# Altium PCB PCB_ALU.PcbDoc (part 2 of 2)
Units mil, origin at the board's own origin, x right, y up, seen from the top; angles counter-clockwise.
Board outline 7085 x 7085 mil, 4 copper layers (Top Layer, VCC, GND, Bottom Layer), stack 23.756 mil thick; 181 components, 134 nets, 644 pads, 294 vias.
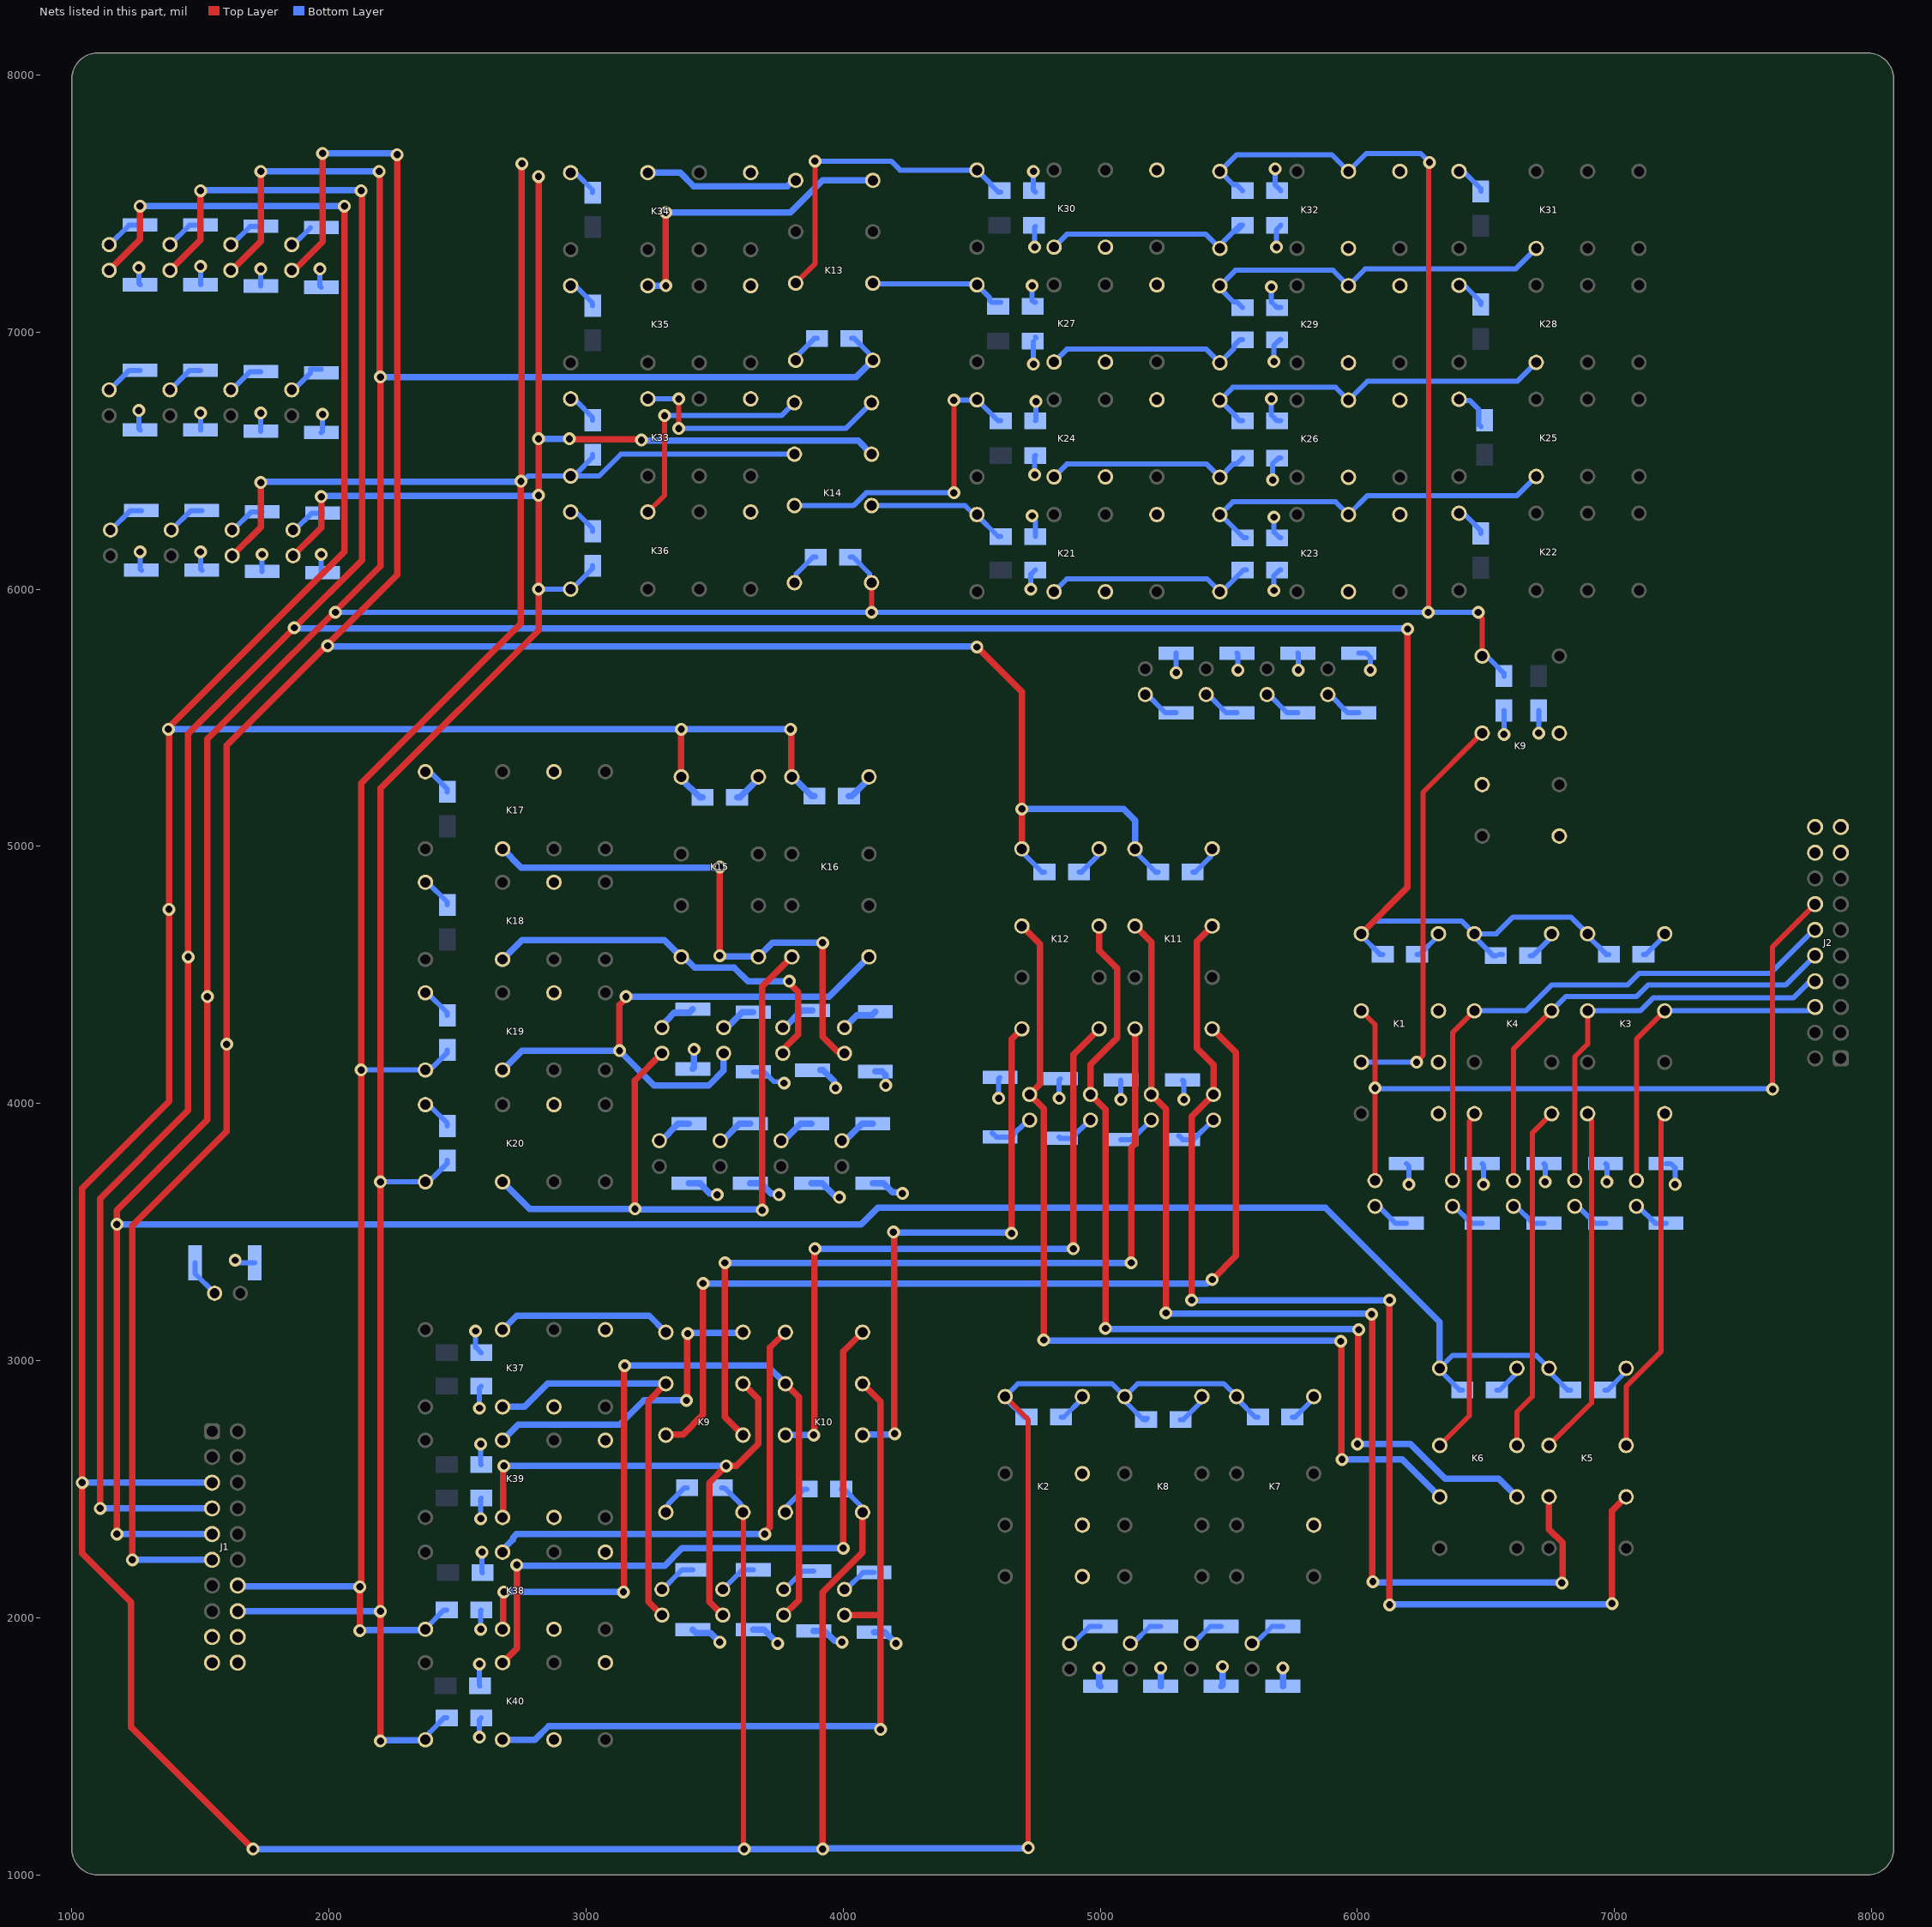
[diagram p4: the nets of this part, all layers, seen from the top]

## Via types
v1: diameter 50, hole 28, Top Layer to Bottom Layer, 290 vias
v2: diameter 240, hole 126, Top Layer to Bottom Layer, 4 vias

## Nets (pads, with @x,y where several pads share a name; then routed paths per layer and width w, separated by ;. In a path a pad name is that pad's centre, name@x,y a point inside that pad or via, vN(x,y) a via of type N, cw(c..) or ccw(c..) an arc to the next point about the centre after c; other vN are vias at no path point) (continued)
ALU_B2: D19.1 D41.1 D48.1 DS37.1 J1.14 K14.6 K19.1 K33.1 K38.1 | length 9760.7
  Top Layer w25: DS37.1@1623.33,6130 1735,6241.67 v1(1735,6415) ; v1(2120,1950) v1(2120,2120) ; v1@2125.23,2120 2125.23,5245.23 2746.3,5866.3 v1(2746.3,6420) 2748.15,6421.85 2748.15,7653.15 v1(2750,7655)
  Bottom Layer w20: v1(2125,4130) K19.1@2375,4130 2382.65,4137.65 2400.15,4137.65 2460,4197.5 D19.1@2460,4208 ; K38.1@2375,1955 2375,1957.5 2447.5,2030 D48.1@2458,2030 ; v1(2746.3,6420) 2754.41,6420 2774.41,6440 K33.1@2940,6440 ; D41.1@3025,6523 3025,6512.5 2960.15,6447.65 2947.65,6447.65 K33.1@2940,6440 ; K14.6@3810,6525 3135,6525 3050,6440 K33.1@2940,6440
  Bottom Layer w25: J1.14@1645,2125 1647.5,2122.5 2117.5,2122.5 v1(2120,2120) ; v1(1735,6415) 1737.5,6417.5 v1@2743.8,6417.5 ; v1(2120,1950) 2122.5,1952.5 2372.5,1952.5 K38.1@2375,1955
ALU_B3: D20.1 D44.1 D52.1 DS38.1 J1.16 K14.3 K20.1 K36.1 K40.1 | length 10197.7
  Top Layer w25: DS38.1@1865,6125 DS38.1@1860,6130 1970,6240 v1(1970,6360) ; v1(2200,1520) v1(2200,2025) 2200,5225 2815,5840 v1(2815,6000) v1(2815,6365) v1(2815,6585) v1(2815,7605) ; v1(2935,6585) 2937.5,6582.5 3212.5,6582.5 v1(3215,6580)
  Bottom Layer w20: v1(2200,3695) K20.1@2375,3695 2382.65,3702.65 2395.15,3702.65 2460,3767.5 D20.1@2460,3778 ; K40.1@2375,1525 2375,1535.82 2391.18,1552 2391.18,1553.68 2447.5,1610 D52.1@2458,1610 ; v1(2815,6000) K36.1@2940,6000 2944.5,6000 3025,6080.5 D44.1@3025,6091
  Bottom Layer w25: J1.16@1645,2025 v1(2200,2025) ; v1(1970,6360) 1972.5,6362.5 v1@2812.5,6362.5 ; v1(2200,1520) 2202.5,1522.5 2372.5,1522.5 K40.1@2375,1525 ; v1(2815,6585) v1(2935,6585) ; v1(3215,6580) 3217.5,6577.5 4057.5,6577.5 K14.3@4110,6525
ALU_Cout: DS26.1 J2.14 K1.2 | length 3019.2
  Top Layer w20: K1.2@6015,4360 6068.33,4306.67 v1(6068.33,4060) DS26.1@6068.33,3700 ; v1(7615,4055) 7615,4610 J2.14@7780,4775
  Bottom Layer w20: v1(6068.33,4060) 6070.83,4057.5 7612.5,4057.5 v1(7615,4055)
ALU_Gates0: DS9.1 K5.6 K11.7 | length 4801.8
  Top Layer w25: v1(5355,3235) 5355,3950 DS9.1@5440,4035 5440,4150 5375,4215 5375,4630 K11.7@5435,4690 ; v1(6125,2050) v1(6125,3235) ; v1(6990,2055) 6990,2415 K5.6@7045,2470
  Bottom Layer w25: v1(5355,3235) v1(6125,3235) ; v1(6125,2050) 6127.5,2052.5 6987.5,2052.5 v1(6990,2055)
ALU_Gates1: DS10.1 K5.3 K11.2 | length 4493.7
  Top Layer w25: K11.2@5135,4690 5198.33,4626.67 DS10.1@5198.33,4035 5255,3978.33 v1(5255,3185) ; v1(6055,3180) 6057.5,3177.5 6057.5,2142.5 v1(6060,2140) ; K5.3@6745,2470 6745,2344.25 6797.5,2291.75 6797.5,2137.5 v1(6795,2135)
  Bottom Layer w25: v1(5255,3185) 5257.5,3182.5 6052.5,3182.5 v1(6055,3180) ; v1(6060,2140) 6062.5,2137.5 6792.5,2137.5 v1(6795,2135)
ALU_Gates2: DS11.1 K6.6 K12.7 | length 3800
  Top Layer w25: K12.7@4995,4690 4995,4595 5065,4525 5065,4255 4961.67,4151.67 DS11.1@4961.67,4035 5020,3976.67 v1(5020,3125) ; v1(6000,2675) 6002.5,2677.5 6002.5,3117.5 v1(6005,3120)
  Bottom Layer w25: v1(5020,3125) 5022.5,3122.5 6002.5,3122.5 v1(6005,3120) ; v1(6000,2675) 6206.15,2675 6341.15,2540 6550,2540 K6.6@6620,2470
ALU_Gates3: DS12.1 K6.3 K12.2 | length 3737.5
  Top Layer w25: K12.2@4695,4690 4765,4620 4765,4075 DS12.1@4725,4035 4780,3980 v1(4780,3080) ; v1(5935,3075) 5937.5,3072.5 5937.5,2617.5 v1(5940,2615)
  Bottom Layer w25: v1(4780,3080) 4782.5,3077.5 5932.5,3077.5 v1(5935,3075) ; v1(5940,2615) 6175,2615 K6.3@6320,2470
ALU_OR0: DS5.1 K15.5 K17.2 | length 2122.8
  Top Layer w25: v1(3520,4575) v1(3520,4920) ; v1(3920,4625) 3920,4260 3978.48,4201.52 3998.48,4201.52 DS5.1@4005,4195
  Bottom Layer w25: K17.2@2675,4990 2747.5,4917.5 3517.5,4917.5 v1(3520,4920) ; v1(3520,4575) 3523.96,4571.04 3668.96,4571.04 K15.5@3670,4570 3725,4625 v1(3920,4625)
ALU_OR1: DS6.1 K15.4 K18.2 | length 1537.4
  Top Layer w25: DS6.1@3751.11,4195 3825,4268.89 3825,4433.24 3790,4468.24 v1(3790,4475)
  Bottom Layer w25: K18.2@2675,4560 2750,4635 3305,4635 K15.4@3370,4570 3379.47,4570 3421.97,4527.5 3576.35,4527.5 3628.85,4475 v1(3790,4475)
ALU_OR2: DS7.1 K16.5 K19.2 | length 2267.5
  Top Layer w25: v1(3130,4205) 3130,4383.24 3155,4408.24 v1(3155,4415)
  Bottom Layer w25: K19.2@2675,4130 2750,4205 v1(3130,4205) 3265,4070 3476.82,4070 3535,4128.18 DS7.1@3535,4195 ; v1(3155,4415) 3945,4415 K16.5@4100,4570
ALU_OR3: DS8.1 K16.4 K20.2 | length 2736.7
  Top Layer w25: v1(3190,3590) 3190,4090 DS8.1@3295,4195 ; v1(3685,3585) 3685,4455 K16.4@3800,4570
  Bottom Layer w25: K20.2@2675,3695 2780,3590 v1(3190,3590) 3192.5,3587.5 3682.5,3587.5 v1(3685,3585)
ALU_OUT0: DS27.1 J2.6 K3.7 | length 1296.8
  Top Layer w20: DS27.1@7085,3700 7085,4250 K3.7@7195,4360
  Bottom Layer w20: K3.7@7195,4360 7753.37,4360 7768.37,4375 J2.6@7780,4375
ALU_OUT1: DS28.1 J2.8 K3.2 | length 1613.3
  Top Layer w20: DS28.1@6845,3700 6845,4180.71 6895,4230.71 K3.2@6895,4360
  Bottom Layer w20: K3.2@6895,4360 7100,4360 7150,4410 7695,4410 7751.77,4466.77 7771.77,4466.77 J2.8@7780,4475
ALU_OUT2: DS29.1 J2.10 K4.7 | length 1835.5
  Top Layer w20: DS29.1@6606.67,3700 6606.67,4211.67 K4.7@6755,4360
  Bottom Layer w20: K4.7@6755,4360 6810,4415 7085,4415 7130,4460 7665,4460 J2.10@7780,4575
ALU_OUT3: DS30.1 J2.12 K4.2 | length 2150.7
  Top Layer w20: DS30.1@6370,3700 6370,4275 K4.2@6455,4360
  Bottom Layer w20: K4.2@6455,4360 6655,4360 6755,4460 7050,4460 7095,4505 7605,4505 7775,4675 J2.12@7780,4675
ALU_XNOR0: K9.5@3310,3110 K37.7 | length 684.7
  Bottom Layer w25: K37.7@2675,3120 2730,3175 3245,3175 K9.5@3310,3110
ALU_XNOR1: K9.4@3610,3110 K39.7 | length 1258.3
  Top Layer w25: v1(3390,2845) 3392.5,2847.5 3392.5,3102.5 v1(3395,3105)
  Bottom Layer w25: K39.7@2675,2690 2735,2750 3130,2750 3225,2845 v1(3390,2845) ; v1(3395,3105) 3397.5,3107.5 3607.5,3107.5 K9.4@3610,3110
ALU_XNOR2: K10.5 K38.7 | length 1876.1
  Top Layer w25: v1(3695,2325) 3695,2331.76 3715,2351.76 3715,3050 K10.5@3775,3110
  Bottom Layer w25: K38.7@2675,2255 2675,2264.47 2715,2304.47 2715,2310.36 2729.64,2325 v1(3695,2325)
ALU_XNOR3: K10.4 K40.7 | length 2572.8
  Top Layer w25: K40.7@2675,1825 2730,1880 v1(2730,2205) ; v1(4000,2270) 4000,3035 K10.4@4075,3110
  Bottom Layer w25: v1(2730,2205) 2732.5,2202.5 3305.68,2202.5 3373.18,2270 v1(4000,2270)
ALU_XOR0: DS13.1 K9.6@3310,2910 K37.2 | length 1621.6
  Top Layer w25: DS13.1@3295,2010 3242.97,2062.03 3242.97,2842.97 K9.6@3310,2910
  Bottom Layer w25: K37.2@2675,2820 2760,2820 2850,2910 K9.6@3310,2910
ALU_XOR1: DS14.1 K9.3@3610,2910 K39.2 | length 2115.8
  Top Layer w25: K39.2@2675,2390 2677.5,2392.5 2677.5,2587.5 v1(2680,2590) ; DS14.1@3531.67,2010 3479.64,2062.03 3479.64,2524.64 v1(3545,2590) 3585,2590 3670,2675 3670,2850 K9.3@3610,2910
  Bottom Layer w25: v1(2680,2590) v1(3545,2590)
ALU_XOR2: DS15.1 K10.6 K38.2 | length 3094.4
  Top Layer w25: K38.2@2675,1955 2677.5,1957.5 2677.5,2097.5 v1(2680,2100) ; v1(3145,2100) 3147.5,2102.5 3147.5,2977.5 v1(3150,2980) ; DS15.1@3768.33,2010 3827.5,2069.17 3827.5,2857.5 K10.6@3775,2910
  Bottom Layer w25: v1(2680,2100) v1(3145,2100) ; v1(3150,2980) 3705,2980 K10.6@3775,2910
ALU_XOR3: DS16.1 K10.3 K40.2 | length 3010.9
  Top Layer w25: DS16.1@4005,2010 4145,2010 ; K10.3@4075,2910 4145,2840 4145,2010 ; v1(4145,1565) 4145,2010
  Bottom Layer w25: K40.2@2675,1525 2800.75,1525 2853.25,1577.5 4125.74,1577.5 4138.24,1565 v1(4145,1565)
ALU_XORXNOR0: K9.7@3310,2710 K11.5 | length 3725.6
  Top Layer w25: K9.7@3310,2710 3312.5,2712.5 3377.5,2712.5 3455,2790 v1(3455,3300) ; v1(5435,3315) 5527.03,3407.03 5527.03,4197.97 K11.5@5435,4290
  Bottom Layer w25: v1(3455,3300) 5413.24,3300 5428.24,3315 v1(5435,3315)
ALU_XORXNOR1: K9.2@3610,2710 K11.4 | length 3195.2
  Top Layer w25: v1(3540,3380) 3540,2780 K9.2@3610,2710 ; v1(5120,3380) 5120,3828.54 5135,3843.54 K11.4@5135,4290
  Bottom Layer w25: v1(3540,3380) v1(5120,3380)
ALU_XORXNOR2: K10.7 K12.5 | length 2738.5
  Top Layer w25: v1(3885,2710) 3887.5,2712.5 3887.5,3432.5 v1(3890,3435) ; v1(4895,3435) 4895,4190 K12.5@4995,4290
  Bottom Layer w25: K10.7@3775,2710 v1(3885,2710) ; v1(3890,3435) v1(4895,3435)
ALU_XORXNOR3: K10.2 K12.4 | length 2187.8
  Top Layer w25: v1(4195,3500) 4197.5,3497.5 4197.5,2717.5 v1(4200,2715) ; v1(4655,3495) 4655,4250 K12.4@4695,4290
  Bottom Layer w25: K10.2@4075,2710 4077.5,2712.5 4197.5,2712.5 v1(4200,2715) ; v1(4195,3500) 4197.5,3497.5 4652.5,3497.5 v1(4655,3495)
AxB_U_FullAdder1: D25.1 K21.2 K23.1 | length 824.6
  Bottom Layer w20: K21.2@4820,5990 4870,6040 5415,6040 K23.1@5465,5990 5472.5,5990 5557.5,6075 D25.1@5568,6075
AxB_U_FullAdder2: D30.1 K24.2 K26.1 | length 806.2
  Bottom Layer w20: K24.2@4820,6436.67 4870,6486.67 5413.33,6486.67 K26.1@5465,6435 5517.5,6487.5 5530.5,6487.5 D30.1@5553,6510
AxB_U_FullAdder3: D35.1 K27.2 K29.1 | length 818.4
  Bottom Layer w20: K27.2@4820,6883.33 4870,6933.33 5411.67,6933.33 K29.1@5465,6880 ; K29.1@5465,6882 5520,6937 5520,6947.5 5542.5,6970 D35.1@5553,6970
AxB_U_FullAdder4: D40.1 K30.2 K32.1 | length 863.7
  Bottom Layer w20: K30.2@4820,7330 4870,7380 5410,7380 K32.1@5465,7325 ; K32.1@5465,7335.82 K32.1@5465,7325 ; D40.1@5530.5,7392.5 D40.1@5553,7415 5542.5,7415 5472.65,7345.15 5472.65,7332.65 K32.1@5465,7325
B_U_FullAdder1: D21.1 K14.2 K21.8 | length 554.2
  Bottom Layer w20: K14.2@4110,6325 4474.18,6325 4509.18,6290 K21.8@4520,6290 4520,6287.5 4602.5,6205 D21.1@4613,6205
B_U_FullAdder2: D26.1 K14.7 K24.8 | length 1218.2
  Top Layer w20: v1(4430,6375) v1(4430,6735)
  Bottom Layer w20: K14.7@3810,6325 4039.29,6325 4089.29,6375 v1(4430,6375) ; v1(4430,6735) 4430.83,6735.83 4519.17,6735.83 K24.8@4520,6736.67 4520.83,6736.67 4602.5,6655 D26.1@4613,6655
B_U_FullAdder3: D31.1 K13.2 K27.8 | length 535.4
  Bottom Layer w20: K13.2@4115,7190 4118.33,7186.67 4516.67,7186.67 4570,7133.33 4570,7122.5 4577.5,7115 D31.1@4613,7115
B_U_FullAdder4: D36.1 K13.7 K30.8 | length 1280.2
  Top Layer w20: K13.7@3815,7190 3890,7265 v1(3890,7665)
  Bottom Layer w20: v1(3890,7665) 4186.15,7665 4221.15,7630 K30.8@4520,7630 4575,7575 4575,7572.5 4602.5,7545 D36.1@4613,7545
Cin_U_FullAdder1: D24.1 K23.6 K23.8 K25.2 | length 1473.1
  Bottom Layer w20: D24.1@5568,6200 5557.5,6200 5467.5,6290 K23.8@5465,6290 5515,6340 5915,6340 K23.6@5965,6290 6039.17,6364.17 6620.83,6364.17 K25.2@6695,6438.33
Cin_U_FullAdder2: D29.1 K26.6 K26.8 K28.2 | length 1454.8
  Bottom Layer w20: D29.1@5553,6655 5542.5,6655 5520,6677.5 5520,6680 K26.8@5465,6735 5515,6785 5915,6785 K26.6@5965,6735 6038.33,6808.33 6621.67,6808.33 K28.2@6695,6881.67
Cin_U_FullAdder3: D34.1 K29.6 K29.8 K31.2 | length 1468.8
  Bottom Layer w20: D34.1@5553,7095 5530.5,7117.5 5517.5,7117.5 5465,7170 K29.8@5465,7180 5525,7240 5905,7240 K29.6@5965,7180 6030,7245 6615,7245 K31.2@6695,7325
Cin_U_FullAdder4: D5.1 D6.1 D13.1@4027,6125 D14.1 D39.1 DS23.1 J1.9 K5.1 K6.1 K9.1@6485,5740 K13.1 K14.1 K32.6 K32.8 | length 23099.8
  Top Layer w20: v1(4110,5910) K14.1@4110,6025 ; v1(6275,5910) 6277.5,5912.5 6277.5,7657.5 v1(6280,7660) ; v1(6470,5910) 6470,5901.88 6485,5886.88 K9.1@6485,5740
  Top Layer w25: v1(1175,2325) v1(1175,3530) 1175,3585 1527.05,3937.05 v1(1527.05,4415) 1527.05,5417.05 2200,6090 v1(2200,6825) 2197.5,6827.5 2197.5,7624.16 v1@2196.66,7625 ; DS23.1@1618.33,7240 1621.61,7240 1735,7353.39 v1(1735,7625)
  Bottom Layer w20: v1(2025,5910) v1(4110,5910) v1(6275,5910) v1(6470,5910) ; D13.1@4027,6125 4037.5,6125 4102.35,6060.15 4102.35,6032.65 K14.1@4110,6025 ; D14.1@4032,6975 4042.5,6975 4107.35,6910.15 4107.35,6897.65 K13.1@4115,6890 ; D39.1@5553,7550 5530.5,7572.5 5517.5,7572.5 K32.8@5465,7625 5530,7690 5900,7690 K32.6@5965,7625 6035,7695 6245,7695 v1(6280,7660) ; D5.1@6408,2885 6397.5,2885 6320,2962.5 K6.1@6320,2970 6370,3020 6695,3020 K5.1@6745,2970 6752.65,2962.35 6752.65,2949.85 6817.5,2885 D6.1@6828,2885 ; K9.1@6485,5740 6492.65,5732.35 6510.15,5732.35 6570,5672.5 D14.1@6570,5662
  Bottom Layer w25: v1(1175,2325) J1.9@1545,2325 ; v1(1175,3530) 4070,3530 4135,3595 5875,3595 6130,3340 6320,3150 K6.1@6320,2970 ; v1(1735,7625) v1(2195,7625) v1@2196.66,7625 ; v1(2200,6825) 4050,6825 K13.1@4115,6890
GND: D1.2 D2.2 D3.2 D4.2 D5.2 D6.2 D7.2 D8.2 D9.2 D10.2 D11.2 D12.2 D13.2 D14.2 D15.2 D16.2 D17.2 D18.2 D19.2 D20.2 D21.2 D22.2 D23.2 D24.2 D25.2 D26.2 D27.2 D28.2 D29.2 D30.2 D31.2 D32.2 D33.2 D34.2 D35.2 D36.2 D37.2 D38.2 D39.2 D40.2 D41.2 D42.2 D43.2 D44.2 D45.2 D46.2 D47.2 D48.2 D49.2 D50.2 D51.2 D52.2 J1.17 J1.18 J1.19 J1.20 J2.17 J2.18 J2.19 J2.20 K1.8 K2.8 K3.8 K4.8 K5.8 K6.8 K7.6 K7.8 K8.8 K9.3@6485,5240 K9.5@6785,5040 K9.8@3310,2410 K10.8 K11.8 K12.8 K13.8 K14.8 K15.8 K16.8 K17.6 K17.8 K18.6 K18.8 K19.6 K19.8 K20.6 K20.8 K21.3 K21.5 K22.8 K23.3 K23.5 K24.3 K24.5 K25.8 K26.3 K26.5 K27.3 K27.5 K28.8 K29.3 K29.5 K30.3 K30.5 K31.8 K32.3 K32.5 K33.5 K33.8 K34.5 K34.8 K35.5 K35.8 K36.5 K36.8 K37.3 K37.5 K38.3 K38.5 K39.3 K39.5 K40.3 K40.5 R1.2 R2.2 R3.2 R4.2 R?1.2 R?2.2 R?3.2 R?4.2 R?5.2 R?6.2 R?7.2 R?8.2 R?9.2 R?10.2 R?11.2 R?12.2 R?13.2 R?14.2 R?15.2 R?16.2 R?17.2 R?18.2 R?19.2 R?20.2 R?21.2 R?22.2 R?23.2 R?24.2 R?25.2 R?26.2 R?27.2 R?28.2 R?29.2 R?30.2 R?31.2 R?32.2 R?33.2 R?34.2 R?35.2 R?36.2 R?37.2 R?38.2 | length 9490.2
  Bottom Layer w20: v1(1260,6695) 1260,6624 R?27.2@1265,6619 ; v1(1260,7250) 1260,7189 R?17.2@1265,7184 ; v1(1265,6145) 1265,6079 R?31.2@1270,6074 ; v1(1500,6145) 1500,6079 R?32.2@1505,6074 ; R?28.2@1500,6619 v1(1500,6685) ; R?18.2@1500,7184 v1(1500,7255) ; v1(1635,3390) 1643.12,3390 1653.12,3380 R?21.2@1711,3380 ; R?29.2@1735,6614 v1(1735,6685) ; R?19.2@1735,7179 v1(1735,7245) ; R?33.2@1740,6069 v1(1740,6135) ; v1(1965,7245) 1965,7179 R?20.2@1970,7174 ; v1(1970,6135) 1970,6069 R?34.2@1975,6064 ; R?30.2@1970,6609 1975,6614 v1(1975,6680) ; K20.8@2375,3995 2382.65,3987.35 2395.15,3987.35 2460,3922.5 D20.2@2460,3912 ; K19.8@2375,4430 2382.5,4430 2460,4352.5 D19.2@2460,4342 ; K18.8@2375,4860 2382.5,4860 2460,4782.5 D18.2@2460,4772 ; K17.8@2375,5290 2382.65,5282.35 2400.15,5282.35 2460,5222.5 D17.2@2460,5212 ; v1(2570,3115) 2570,3052 D45.2@2592,3030 ; v1(2585,1535) 2585,1603 D52.2@2592,1610 ; v1(2585,1820) 2585,1737 D50.2@2587,1735 ; v1(2585,2815) 2585,2893 D47.2@2592,2900 ; v1(2590,1955) 2590,2028 D48.2@2592,2030 ; v1(2590,2385) 2590,2463 D51.2@2592,2465 ; v1(2590,2675) 2590,2597 D49.2@2592,2595 ; v1(2595,2255) 2595,2177 D46.2@2597,2175 ; K36.8@2940,6300 2947.65,6292.35 2968.15,6292.35 3025,6235.5 D44.2@3025,6225 ; K33.8@2940,6740 2947.65,6732.35 2960.15,6732.35 3025,6667.5 D41.2@3025,6657 ; K35.8@2940,7180 2947.65,7172.35 2965.15,7172.35 3025,7112.5 D43.2@3025,7102 ; K34.8@2940,7620 2947.65,7612.35 2965.15,7612.35 3025,7552.5 D42.2@3025,7542 ; K9.8@3310,2410 3317.65,2417.65 3317.65,2440.15 3382.5,2505 D9.2@3393,2505 ; R?3.2@3650,4123 3692,4123 3730.26,4084.74 3764.26,4084.74 v1(3770,4079) ; K10.8@3775,2410 3782.65,2417.65 3782.65,2435.15 3847.5,2500 D10.2@3858,2500 ; K14.8@3810,6025 3817.65,6032.65 3817.65,6060.15 3882.5,6125 D13.2@3893,6125 ; K13.8@3815,6890 3822.65,6897.65 3822.65,6910.15 3887.5,6975 D14.2@3898,6975 ; v1(4605,4020) 4605,4096 R?8.2@4610,4101 ; v1(4730,6000) 4730,6058 D22.2@4747,6075 ; v1(4735,6285) 4735,6276.88 4747,6264.88 D21.2@4747,6205 ; v1(4735,7180) 4735,7122.5 4742.5,7115 D31.2@4747,7115 ; v1(4740,6875) D32.2@4740,6962 ; v1(4740,7625) 4740,7552 D36.2@4747,7545 ; v1(4745,6445) 4745,6518 D27.2@4747,6520 ; v1(4745,7330) 4745,7408 D37.2@4747,7410 ; D26.2@4747,6655 4750,6658 v1(4750,6730) ; D32.2@4747,6980 D32.2@4750,6977 ; v1(4840,4020) 4840,4091 R?7.2@4845,4096 ; D2.2@4847,2780 4857.5,2780 4930,2852.5 K2.8@4930,2860 ; D12.2@4917,4900 4927.5,4900 4987.35,4959.85 4987.35,4982.35 K12.8@4995,4990 ; v1(5080,4015) R?6.2@5080,4091 ; v1(5295,5675) R?38.2@5295,5751 ; D7.2@5312,2770 5322.5,2770 5387.35,2834.85 5387.35,2852.35 K8.8@5395,2860 ; R?5.2@5320,4091 5325,4086 v1(5325,4015) ; D11.2@5359,4900 5369.5,4900 5427.35,4957.85 5427.35,4982.35 K11.8@5435,4990 ; R?37.2@5531.67,5751 5535,5747.67 v1(5535,5685) ; v1(5665,6740) 5665,6677.5 5687.5,6655 D29.2@5702,6655 ; v1(5665,7175) 5665,7117.5 5687.5,7095 D34.2@5702,7095 ; v1(5670,6425) 5670,6487.5 5692.5,6510 D30.2@5702,6510 ; v1(5675,5995) 5675,6052.5 5697.5,6075 D25.2@5702,6075 ; v1(5675,6280) 5675,6222.5 5697.5,6200 D24.2@5702,6200 ; v1(5675,6885) 5675,6947.5 5697.5,6970 D35.2@5702,6970 ; v1(5680,7635) 5680,7572 D39.2@5702,7550 ; v1(5685,7330) 5685,7398 D40.2@5702,7415 ; D8.2@5747,2780 5757.5,2780 5830,2852.5 K7.8@5830,2860 ; R?36.2@5768.33,5751 5770,5749.33 v1(5770,5685) ; R?35.2@6005,5751 6034,5751 6050,5735 v1(6050,5685) ; R?22.2@6190,3766 6200,3756 v1(6200,3685) ; D1.2@6232,4580 6242.5,4580 6315,4652.5 K1.8@6315,4660 ; K22.8@6395,6295 6402.65,6287.35 6420.15,6287.35 6480,6227.5 D23.2@6480,6217 ; K25.8@6395,6738.33 6399.09,6734.24 6435.76,6734.24 6472.5,6697.5 6472.5,6639.5 D28.2@6480,6632 ; K28.8@6395,7181.67 6402.65,7174.01 6423.49,7174.01 6480,7117.5 D33.2@6480,7107 ; K31.8@6395,7625 6402.65,7617.35 6420.15,7617.35 6480,7557.5 D38.2@6480,7547 ; R?26.2@6485,3766 6490,3761 v1(6490,3685) ; D5.2@6542,2885 6552.5,2885 6612.35,2944.85 6612.35,2962.35 K6.8@6620,2970 ; v1(6570,5435) D14.2@6570,5528 ; D4.2@6672,4575 6682.5,4575 6747.35,4639.85 6747.35,4652.35 K4.8@6755,4660 ; v1(6705,5440) D13.2@6705,5528 ; R?25.2@6725,3766 6730,3761 v1(6730,3695) ; D6.2@6962,2885 6972.5,2885 7037.35,2949.85 7037.35,2962.35 K5.8@7045,2970 ; R?24.2@6965,3766 6970,3761 v1(6970,3695) ; D3.2@7112,4580 7122.5,4580 7195,4652.5 K3.8@7195,4660 ; R?23.2@7200,3766 7219,3766 7235,3750 v1(7235,3685)
  Bottom Layer w25: R2.2@3400,3689 3442,3689 3481.22,3649.78 3505.22,3649.78 v1(3510,3645) ; R?9.2@3415,1954 3428.5,1940.5 3484.5,1940.5 v1(3520,1905) ; R?4.2@3415,4134 3420,4139 v1(3420,4210) ; D15.2@3587,5190 3597.5,5190 3670,5262.5 K15.8@3670,5270 ; R4.2@3638.33,3689 3680.33,3689 3719.55,3649.78 3745.22,3649.78 v1(3750,3645) ; R?10.2@3650,1954 3692,1954 3745,1901 v1(3745,1900) ; R3.2@3876.67,3689 3918.67,3689 3967.88,3639.78 3980.22,3639.78 v1(3985,3635) ; R?11.2@3885,1949 3927,1949 3966.22,1909.78 3990.22,1909.78 v1(3995,1905) ; R?2.2@3912,4129 3922,4129 3965.22,4085.78 3965.22,4064.78 v1(3970,4060) ; D16.2@4022,5195 4032.5,5195 4100,5262.5 K16.8@4100,5270 ; R1.2@4115,3689 4157,3689 4191.22,3654.78 4225.22,3654.78 v1(4230,3650) ; R?12.2@4120,1944 4162,1944 4205,1901 v1(4205,1900) ; R?1.2@4125,4124 4151.5,4124 4165,4110.5 v1(4165,4070) ; v1(4995,1805) 4995,1739 R?16.2@5000,1734 ; R?15.2@5235,1734 v1(5235,1805) ; R?14.2@5470,1734 5475,1739 v1(5475,1810) ; R?13.2@5710,1734 v1(5710,1805)
NetDS1_2: DS1.2 R1.1 | length 147.3
  Bottom Layer w25: DS1.2@3995,3855 4001.52,3861.52 4013.52,3861.52 4073,3921 R1.1@4115,3921
NetDS2_2: DS2.2 R2.1 | length 142.3
  Bottom Layer w25: DS2.2@3285,3855 3292,3855 3358,3921 R2.1@3400,3921
NetDS3_2: DS3.2 R3.1 | length 145.7
  Bottom Layer w25: DS3.2@3758.33,3855 3764.85,3861.52 3775.18,3861.52 3834.67,3921 R3.1@3876.67,3921
NetDS4_2: DS4.2 R4.1 | length 144
  Bottom Layer w25: DS4.2@3521.67,3855 3530.33,3855 3596.33,3921 R4.1@3638.33,3921
NetDS5_2: DS5.2 R?1.1 | length 145.3
  Bottom Layer w25: DS5.2@4005,4295 4052.5,4342.5 4111.5,4342.5 R?1.1@4125,4356
NetDS6_2: DS6.2 R?2.1 | length 172.4
  Bottom Layer w25: DS6.2@3755,4295 3761.52,4301.52 DS6.2@3772.41,4301.52 ; DS6.2@3765,4295 3772,4295 R?2.1@3838,4361 ; R?2.1@3828,4361 R?2.1@3838,4361 ; R?2.1@3880,4361 R?2.1@3838,4361
NetDS7_2: DS7.2 R?3.1 | length 139.9
  Bottom Layer w25: DS7.2@3535,4295 3541.52,4301.52 3554.52,4301.52 3608,4355 R?3.1@3650,4355
NetDS8_2: DS8.2 R?4.1 | length 155.3
  Bottom Layer w25: DS8.2@3295,4295 3295,4304.22 3312.03,4321.24 3312.03,4322.03 3342.5,4352.5 3401.5,4352.5 R?4.1@3415,4366
NetDS9_2: DS9.2 R?5.1 | length 172.7
  Bottom Layer w20: R?5.1@5305,3874 R?5.1@5320,3859 5362,3859 5438,3935 DS9.2@5440,3935
NetDS10_2: DS10.2 R?6.1 | length 149.8
  Bottom Layer w20: R?6.1@5080,3859 5122,3859 5198,3935 DS10.2@5198.33,3935
NetDS11_2: DS11.2 R?7.1 | length 153.1
  Bottom Layer w20: R?7.1@4840,3869 R?7.1@4845,3864 4887,3864 4958,3935 DS11.2@4961.67,3935
NetDS12_2: DS12.2 R?8.1 | length 179
  Bottom Layer w20: R?8.1@4580,3885 4596,3869 4652,3869 4718,3935 DS12.2@4725,3935
NetDS13_2: DS13.2 R?9.1 | length 151.5
  Bottom Layer w20: DS13.2@3295,2110 3297,2110 3373,2186 R?9.1@3415,2186
NetDS14_2: DS14.2 R?10.1 | length 149.8
  Bottom Layer w20: DS14.2@3531.67,2110 3532,2110 3608,2186 R?10.1@3650,2186
NetDS15_2: DS15.2 R?11.1 | length 146.1
  Bottom Layer w20: DS15.2@3768.33,2110 3772,2110 3843,2181 R?11.1@3885,2181
NetDS16_2: DS16.2 R?12.1 | length 142.3
  Bottom Layer w20: DS16.2@4005,2110 4012,2110 4078,2176 R?12.1@4120,2176
NetDS17_2: DS17.2 R?13.1 | length 147.3
  Bottom Layer w20: DS17.2@5590,1900 5597.47,1907.47 5609.47,1907.47 5668,1966 R?13.1@5710,1966
NetDS18_2: DS18.2 R?14.1 | length 144
  Bottom Layer w20: DS18.2@5353.33,1900 5362,1900 5428,1966 R?14.1@5470,1966
NetDS19_2: DS19.2 R?15.1 | length 145.7
  Bottom Layer w20: DS19.2@5116.67,1900 5127,1900 5193,1966 R?15.1@5235,1966
NetDS20_2: DS20.2 R?16.1 | length 147.3
  Bottom Layer w20: DS20.2@4880,1900 4887.47,1907.47 4899.47,1907.47 4958,1966 R?16.1@5000,1966
NetDS21_2: DS21.2 R?17.1 | length 151.5
  Bottom Layer w20: DS21.2@1145,7340 1147,7340 1223,7416 R?17.1@1265,7416
NetDS22_2: DS22.2 R?18.1 | length 149.8
  Bottom Layer w20: DS22.2@1381.67,7340 1382,7340 1458,7416 R?18.1@1500,7416
NetDS23_2: DS23.2 R?19.1 | length 146.1
  Bottom Layer w20: DS23.2@1618.33,7340 1622,7340 1693,7411 R?19.1@1735,7411
NetDS24_2: DS24.2 R?20.1 | length 100.3
  Bottom Layer w20: DS24.2@1855,7340 1862,7340 R?20.1@1928,7406
NetDS25_2: DS25.2 R?21.1 | length 149.8
  Bottom Layer w20: R?21.1@1479,3380 1479,3338 1555,3262 DS25.2@1555,3261.67
NetDS26_2: DS26.2 R?22.1 | length 149
  Bottom Layer w20: DS26.2@6068.33,3600 6075.81,3592.53 6089.47,3592.53 6148,3534 R?22.1@6190,3534
NetDS27_2: DS27.2 R?23.1 | length 142.3
  Bottom Layer w20: DS27.2@7085,3600 7092,3600 7158,3534 R?23.1@7200,3534
NetDS28_2: DS28.2 R?24.1 | length 147.3
  Bottom Layer w20: DS28.2@6845,3600 6852.47,3592.53 6864.47,3592.53 6923,3534 R?24.1@6965,3534
NetDS29_2: DS29.2 R?25.1 | length 145.7
  Bottom Layer w20: DS29.2@6606.67,3600 6617,3600 6683,3534 R?25.1@6725,3534
NetDS30_2: DS30.2 R?26.1 | length 142.3
  Bottom Layer w20: DS30.2@6370,3600 6377,3600 6443,3534 R?26.1@6485,3534
NetDS31_2: DS31.2 R?27.1 | length 151.5
  Bottom Layer w20: DS31.2@1145,6775 1147,6775 1223,6851 R?27.1@1265,6851
NetDS32_2: DS32.2 R?28.1 | length 149.8
  Bottom Layer w20: DS32.2@1381.67,6775 1382,6775 1458,6851 R?28.1@1500,6851
NetDS33_2: DS33.2 R?29.1 | length 146.1
  Bottom Layer w20: DS33.2@1618.33,6775 1622,6775 1693,6846 R?29.1@1735,6846
NetDS34_2: DS34.2 R?30.1 | length 142.3
  Bottom Layer w20: DS34.2@1855,6775 1862,6775 R?30.1@1928,6841 ; R?30.1@1928,6856 R?30.1@1970,6856
NetDS35_2: DS35.2 R?31.1 | length 151.5
  Bottom Layer w20: DS35.2@1150,6230 1152,6230 1228,6306 R?31.1@1270,6306
NetDS36_2: DS36.2 R?32.1 | length 149.8
  Bottom Layer w20: DS36.2@1386.67,6230 1387,6230 1463,6306 R?32.1@1505,6306
NetDS37_2: DS37.2 R?33.1 | length 146.1
  Bottom Layer w20: DS37.2@1623.33,6230 1627,6230 1698,6301 R?33.1@1740,6301
NetDS38_2: DS38.2 R?34.1 | length 142.3
  Bottom Layer w20: DS38.2@1860,6230 1867,6230 1933,6296 R?34.1@1975,6296
NetDS39_2: DS39.2 R?35.1 | length 149.4
  Bottom Layer w20: DS39.2@5885,5590 5892,5590 5963,5519 R?35.1@6005,5519
NetDS40_2: DS40.2 R?36.1 | length 149.4
  Bottom Layer w20: DS40.2@5648.33,5590 5655.33,5590 5726.33,5519 R?36.1@5768.33,5519
NetDS41_2: DS41.2 R?37.1 | length 149.4
  Bottom Layer w20: DS41.2@5411.67,5590 5418.67,5590 5489.67,5519 R?37.1@5531.67,5519
NetDS42_2: DS42.2 R?38.1 | length 149.4
  Bottom Layer w20: DS42.2@5175,5590 5182,5590 5253,5519 R?38.1@5295,5519
NetK1_3: K1.3 K9.2@6485,5440 | length 1600.6
  Top Layer w20: v1(6230,4160) 6230,4161.72 6255,4186.72 6255,5210 K9.2@6485,5440
  Bottom Layer w20: K1.3@6015,4160 v1(6230,4160)
NetK1_5: K1.5
NetK1_6: K1.6
NetK1_7: K1.7
NetK2_5: K2.5
NetK2_6: K2.6
NetK2_7: K2.7
NetK3_4: K3.4 K5.2 | length 1364.6
  Top Layer w20: K5.2@6745,2670 6910,2835 6910,3934.18 6895,3949.18 K3.4@6895,3960
NetK3_5: K3.5 K5.7 | length 1352.1
  Top Layer w20: K5.7@7045,2670 7045,2899.29 7180,3034.29 7180,3934.18 7195,3949.18 K3.5@7195,3960
NetK4_4: K4.4 K6.2 | length 1345.9
  Top Layer w20: K6.2@6320,2670 6435,2785 6435,3929.18 6455,3949.18 K4.4@6455,3960
NetK4_5: K4.5 K6.7 | length 1345.9
  Top Layer w20: K6.7@6620,2670 6620,2800 6680,2860 6680,3885 K4.5@6755,3960
NetK9_7: K9.7@6785,5440
NetK13_4: K13.4 K35.7 | length 1211.8
  Top Layer w25: v1(3310,7180) v1(3310,7465)
  Bottom Layer w25: K35.7@3240,7180 v1(3310,7180) ; v1(3310,7465) 3795,7465 3920,7590 K13.4@4115,7590
NetK13_5: K13.5 K34.7 | length 606.1
  Bottom Layer w25: K34.7@3240,7620 3365.75,7620 3418.25,7567.5 3783.03,7567.5 3805.53,7590 K13.5@3815,7590
NetK14_4: K14.4 K33.7 | length 1026.4
  Top Layer w20: v1(3360,6625) v1(3360,6740)
  Bottom Layer w20: K33.7@3240,6740 v1(3360,6740) ; v1(3360,6625) 4010,6625 K14.4@4110,6725
NetK14_5: K14.5 K36.7 | length 927.6
  Top Layer w20: K36.7@3240,6300 3305,6365 v1(3305,6675)
  Bottom Layer w20: v1(3305,6675) 3760,6675 K14.5@3810,6725
OP_P0: D2.1 D7.1 D8.1 D9.1 D10.1 D15.1 D16.1 DS21.1 J1.5 K2.1 K7.1 K8.1 K9.1@3610,2410 K10.1 K15.1 K16.1 | length 20855.4
  Top Layer w20: K9.1@3610,2410 3612.5,2407.5 3612.5,1102.5 v1(3615,1100) ; K2.1@4630,2860 4720,2770 v1(4720,1105)
  Top Layer w25: DS21.1@1145,7240 1265,7360 v1(1265,7490) ; v1(1705,1100) 1230,1575 1230,2060 1040,2250 v1(1040,2525) 1040,3670 1377.5,4007.5 v1(1377.5,4755) 1377.5,5463.99 2060,6146.49 v1(2060,7490) ; K15.1@3370,5270 v1(3370,5455) ; v1(3795,5455) 3797.5,5452.5 3797.5,5272.5 K16.1@3800,5270 ; v1(3920,1100) 3920,2098.58 4075,2253.58 K10.1@4075,2410
  Bottom Layer w20: D9.1@3527,2505 3537.5,2505 3602.35,2440.15 3602.35,2417.65 K9.1@3610,2410 ; D10.1@3992,2500 4002.5,2500 4067.35,2435.15 4067.35,2417.65 K10.1@4075,2410 ; D2.1@4713,2780 4702.5,2780 4630,2852.5 K2.1@4630,2860 4680,2910 5045,2910 K8.1@5095,2860 ; K8.1@5097.5,2860 K8.1@5095,2860 ; D7.1@5165,2775 D7.1@5182.5,2775 ; D7.1@5178,2770 5167.5,2770 5102.65,2834.85 5102.65,2852.35 K8.1@5095,2860 ; D8.1@5613,2780 5602.5,2780 5530,2852.5 K7.1@5530,2860 5480,2910 5145,2910 K8.1@5095,2860
  Bottom Layer w25: v1(1040,2525) J1.5@1545,2525 ; v1(1265,7490) v1(2060,7490) ; v1(1375,5455) v1(3370,5455) v1(3795,5455) ; v1(1705,1100) v1(3615,1100) v1(3920,1100) 3922.5,1102.5 4717.5,1102.5 v1(4720,1105) ; K15.1@3370,5270 3370,5262.5 3442.5,5190 D15.1@3453,5190 ; K16.1@3800,5270 3802.5,5270 3877.5,5195 D16.1@3888,5195
OP_P1: D1.1 D3.1 D4.1 DS22.1 J1.7 K1.1 K3.1 K4.1 | length 13911.2
  Top Layer w25: v1(1110,2425) 1110,3630 1452.27,3972.27 v1(1452.27,4570) 1452.27,5437.27 v1(1865,5850) 2127.96,6112.96 v1@2127.96,7550 ; DS22.1@1381.67,7240 1500,7358.33 v1(1500,7550) ; K1.1@6015,4660 6195,4840 v1(6195,5845)
  Bottom Layer w20: D1.1@6098,4580 6087.5,4580 6015,4652.5 K1.1@6015,4660 6065,4710 6405,4710 K4.1@6455,4660 ; D4.1@6538,4575 6527.5,4575 6462.65,4639.85 6462.65,4652.35 K4.1@6455,4660 ; D4.1@6552.5,4580 D4.1@6563,4580 ; D3.1@6978,4580 6967.5,4580 6895,4652.5 K3.1@6895,4660 6830,4725 6605,4725 6540,4660 K4.1@6455,4660
  Bottom Layer w25: v1(1110,2425) J1.7@1545,2425 ; v1(1500,7550) 1502.5,7552.5 v1@2125.46,7552.5 ; v1(1865,5850) 1867.5,5847.5 6192.5,5847.5 v1(6195,5845)
  other v1: 2125,7550
OP_P3: D11.1 D12.1 DS24.1 J1.11 K11.1 K12.1 | length 11229.4
  Top Layer w25: v1(1235,2225) 1235,3525 1601.82,3891.82 v1(1601.82,4230) ; v1@1601.82,4235 v1(1601.82,4230) ; DS24.1@1855,7240 1864.22,7240 1975,7350.78 v1(1975,7695) ; v1@2265.37,7690 2265.37,6055.37 1995,5785 v1(1995,5780) 1990,5780 1601.82,5391.82 v1(1601.82,4230) ; v1(4520,5775) 4695,5600 K12.1@4695,4990
  Bottom Layer w20: K12.1@4695,4990 4702.65,4982.35 4702.65,4969.85 4772.5,4900 D12.1@4783,4900 ; K11.1@5135,4990 5135,4979.5 5214.5,4900 D11.1@5225,4900
  Bottom Layer w25: v1(1235,2225) J1.11@1545,2225 ; v1(1975,7695) v1@2265.37,7695 ; v1(1995,5780) 1997.5,5777.5 4517.5,5777.5 v1(4520,5775) ; v1(4695,5145) 5090,5145 5134.68,5100.32 5134.68,4990.32 K11.1@5135,4990
  other v1: 2265,7690
pads on no net: J2.5 J2.7 J2.9 J2.11 J2.13 J2.15 K9.6@6785,5240 K22.5 K22.6 K22.7 K25.5 K25.6 K25.7 K28.5 K28.6 K28.7 K31.5 K31.6 K31.7 K33.2 K33.3 K33.4 K34.2 K34.3 K34.4 K35.2 K35.3 K35.4 K36.2 K36.3 K36.4
copper on no net: | length 2811.7
  Top Layer w10: 2705.02,5569.5 2764.5,5569.5 ; 2705.58,5604.5 2769.5,5604.5 ; 2734.5,5624.5 2739.5,5624.5 cw(c2739.5,5589.5) 2774.5,5589.5 cw(c2734.5,5589.5) 2734.5,5549.5 2749.5,5549.5 ccw(c2749.5,5670.21) 2834.85,5584.85 2839.5,5589.5 ; 2737,5624.5 2755,5624.5 cw(c2755,5505) 2839.5,5589.5 ; 2884.5,5589.5 2839.5,5589.5 ; 2915,5420 2975,5420 ; 2915.52,5475 2975,5475 ; 3173.14,5455 3090,5455 ; 3345,7870 3410,7870 ; 3675,7870 3615,7870 ; 4060,7810 4150,7810 ; 4065,7960 4150,7960 ; 4250,7887.5 4357.5,7887.5 ; 2975,5420 2975,5475 ; 2975,5420 2975,5395 3040,5395 ccw(c3040,5445) 3090,5445 3090,5455 ; 2975,5475 2975,5505 3040,5505 cw(c3040,5455) 3090,5455 ; 3615,7870 ccw(c3600,7870) 3615,7870 ; 3410,7795 3410,7945 3585,7870 3410,7795 ; 4150,7750 4250,7825 4250,7950 4150,8025 4150,7750
  other v2: 1200,1200 7885,1200 1200,7885 7885,7885

## Polygon pours and split planes (outlines as drawn)
+24V on VCC (split plane): 7992.84,8064.61 8000.61,8063.46 8008.22,8061.55 8015.61,8058.91 8022.71,8055.55 8029.44,8051.51 8035.75,8046.84 8041.57,8041.57 8046.84,8035.75 8051.51,8029.44 8055.55,8022.71 8058.91,8015.61 8061.55,8008.22 8063.46,8000.61 8064.61,7992.84 8064.97,7985.63 8064.9,7985 8064.9,1100 8064.97,1099.37 8064.61,1092.16 8063.46,1084.39 8061.55,1076.78 8058.91,1069.39 8055.55,1062.29 8051.51,1055.56 8046.84,1049.25 8041.57,1043.43 8035.75,1038.16 8029.44,1033.49 8022.71,1029.45 8015.61,1026.09 8008.22,1023.45 8000.61,1021.54 7992.84,1020.39 7985.63,1020.03 7985,1020.1 1100,1020.1 1099.37,1020.03 1092.16,1020.39 1084.39,1021.54 1076.78,1023.45 1069.39,1026.09 1062.29,1029.45 1055.56,1033.49 1049.25,1038.16 1043.43,1043.43 1038.16,1049.25 1033.49,1055.56 1029.45,1062.29 1026.09,1069.39 1023.45,1076.78 1021.54,1084.39 1020.39,1092.16 1020.03,1099.37 1020.1,1100 1020.1,7985 1020.03,7985.63 1020.39,7992.84 1021.54,8000.61 1023.45,8008.22 1026.09,8015.61 1029.45,8022.71 1033.49,8029.44 1038.16,8035.75 1043.43,8041.57 1049.25,8046.84 1055.56,8051.51 1062.29,8055.55 1069.39,8058.91 1076.78,8061.55 1084.39,8063.46 1092.16,8064.61 1099.37,8064.97 1100,8064.9 7575,8064.9 7985,8064.9 7985.63,8064.97
GND on GND (split plane): 7992.84,8064.61 8000.61,8063.46 8008.22,8061.55 8015.61,8058.91 8022.71,8055.55 8029.44,8051.51 8035.75,8046.84 8041.57,8041.57 8046.84,8035.75 8051.51,8029.44 8055.55,8022.71 8058.91,8015.61 8061.55,8008.22 8063.46,8000.61 8064.61,7992.84 8064.97,7985.63 8064.9,7985 8064.9,1100 8064.97,1099.37 8064.61,1092.16 8063.46,1084.39 8061.55,1076.78 8058.91,1069.39 8055.55,1062.29 8051.51,1055.56 8046.84,1049.25 8041.57,1043.43 8035.75,1038.16 8029.44,1033.49 8022.71,1029.45 8015.61,1026.09 8008.22,1023.45 8000.61,1021.54 7992.84,1020.39 7985.63,1020.03 7985,1020.1 1100,1020.1 1099.37,1020.03 1092.16,1020.39 1084.39,1021.54 1076.78,1023.45 1069.39,1026.09 1062.29,1029.45 1055.56,1033.49 1049.25,1038.16 1043.43,1043.43 1038.16,1049.25 1033.49,1055.56 1029.45,1062.29 1026.09,1069.39 1023.45,1076.78 1021.54,1084.39 1020.39,1092.16 1020.03,1099.37 1020.1,1100 1020.1,7985 1020.03,7985.63 1020.39,7992.84 1021.54,8000.61 1023.45,8008.22 1026.09,8015.61 1029.45,8022.71 1033.49,8029.44 1038.16,8035.75 1043.43,8041.57 1049.25,8046.84 1055.56,8051.51 1062.29,8055.55 1069.39,8058.91 1076.78,8061.55 1084.39,8063.46 1092.16,8064.61 1099.37,8064.97 1100,8064.9 7575,8064.9 7985,8064.9 7985.63,8064.97

## Silkscreen, mask and mechanical layers (free items; w line width, h text height)
Top Overlay:
  lines w10: 1038.7,6584.85 2325,6584.85 2325,6833.83 1038.7,6833.83 1038.7,6584.85 ; 1038.7,7149.85 2440,7149.85 2440,7398.83 1038.7,7398.83 1038.7,7149.85 ; 1043.7,6039.85 1043.7,6288.83 2330,6288.83 2330,6039.85 1043.7,6039.85 ; 3185,3670 3185,3930 4320,3930 4320,3670 4240,3670 3185,3670 ; 3185.61,1908.98 4240.61,1908.98 4320.61,1908.98 4320.61,2168.98 3185.61,2168.98 3185.61,1908.98 ; 3190,4105 4245,4105 4260,4105 4260,4365 3190,4365 3190,4105 ; 4575.61,3750 4575.61,4128.98 5595,4128.98 5595,3750 4575.61,3750 ; 4655,5530 6105,5530 6105,5778.98 4655,5778.98 4655,5530 ; 4760.61,1610 5750,1610 5750,1968.98 4760.61,1968.98 4760.61,1610
  lines w14: 6954.59,3808.77 5935.21,3808.77 5935.21,3415 6245,3415 ; 6245,3415 7279.59,3415 7279.59,3808.77 6245,3808.77 6245,3415
  text "MUX" at 3865,7765 h60
  text "B NOT" at 3080,7760 h60
  text "Ripple Carry Adder" at 5310,7739.99 h60
  text "Adder0" at 7225,7440 h60
  text "OP-CODE" at 2000,7260 h60
  text "Adder1" at 7235,7001.67 h60
  text "TOP-4" at 2015,6690 h60
  text "Adder2" at 7225,6563.33 h60
  text "BOT-4" at 2015,6160 h60
  text "Adder3" at 7225,6125 h60
  text "Sum Out" at 4685,5615 h60
  text "ANDOR MUX" at 3470,5395 h60
  text "AND OR" at 2520,5390 h60
  text "Cout XOR" at 6955,5190 h60 r90
  text "GATES MUX" at 4825,5085 h60
  text "Top3" at 1698.34,4905 h50 r90
  text "ALUOUT MUX" at 6330,4800 h60
  text "Bot3" at 1995,4765 h50 r90
  text "Op0" at 1393.34,4580 h50 r90
  text "Top2" at 1773.34,4475 h50 r90
  text "Op1" at 1473.34,4420 h50 r90
  text "Bot2" at 2070,4340 h50 r90
  text "Op2" at 1548.34,4245 h50 r90
  text "OR" at 4125,4200 h60
  text "Top1" at 1838.34,4055 h50 r90
  text "Op3" at 1628.34,4050 h50 r90
  text "Bot1" at 2150,3920 h50 r90
  text "Selected Gate Out" at 4610,3800 h60
  text "AND" at 4130,3765 h60
  text "Top0" at 1923.34,3610 h50 r90
  text "Bot0" at 2225,3470 h50 r90
  text "Cout" at 5971,3456 h65
  text "ALU Out" at 6486,3456 h80
  text "PWR" at 1535,3435 h60
  text "XOR XNOR" at 2475,3190 h60
  text "XORXNOR MUX" at 3380,3190 h60
  text "SHIFTING GATES MUX" at 6185,3085 h60
  text "SHIFTING" at 5040,2970 h60
  text "XOR" at 4140,2025 h60
  text "Selected Shift" at 4910,1635 h60

## Text inside footprints (layer, text, board x,y; h text height)
DS1: Top Overlay "+" at 4008.78,3684.92 h31.5 r90
DS2: Top Overlay "+" at 3298.78,3684.92 h31.5 r90
DS3: Top Overlay "+" at 3772.11,3684.92 h31.5 r90
DS4: Top Overlay "+" at 3535.45,3684.92 h31.5 r90
DS5: Top Overlay "+" at 4018.78,4124.92 h31.5 r90
DS6: Top Overlay "+" at 3778.78,4124.92 h31.5 r90
DS7: Top Overlay "+" at 3548.78,4124.92 h31.5 r90
DS8: Top Overlay "+" at 3308.78,4124.92 h31.5 r90
DS9: Top Overlay "+" at 5426.22,4105.08 h31.5 r270
DS10: Top Overlay "+" at 5184.55,4105.08 h31.5 r270
DS11: Top Overlay "+" at 4947.89,4105.08 h31.5 r270
DS12: Top Overlay "+" at 4711.22,4105.08 h31.5 r270
DS13: Top Overlay "+" at 3308.78,1939.92 h31.5 r90
DS14: Top Overlay "+" at 3545.45,1939.92 h31.5 r90
DS15: Top Overlay "+" at 3782.11,1939.92 h31.5 r90
DS16: Top Overlay "+" at 4018.78,1939.92 h31.5 r90
DS17: Top Overlay "+" at 5603.78,1729.92 h31.5 r90
DS18: Top Overlay "+" at 5367.11,1729.92 h31.5 r90
DS19: Top Overlay "+" at 5130.45,1729.92 h31.5 r90
DS20: Top Overlay "+" at 4893.78,1729.92 h31.5 r90
DS21: Top Overlay "+" at 1158.78,7169.92 h31.5 r90
DS22: Top Overlay "+" at 1395.45,7169.92 h31.5 r90
DS23: Top Overlay "+" at 1632.11,7169.92 h31.5 r90
DS24: Top Overlay "+" at 1868.78,7169.92 h31.5 r90
DS25: Top Overlay "+" at 1725.08,3275.45 h31.5 r180
DS26: Top Overlay "+" at 6054.55,3770.08 h31.5 r270
DS27: Top Overlay "+" at 7071.22,3770.08 h31.5 r270
DS28: Top Overlay "+" at 6831.22,3770.08 h31.5 r270
DS29: Top Overlay "+" at 6592.89,3770.08 h31.5 r270
DS30: Top Overlay "+" at 6356.22,3770.08 h31.5 r270
DS31: Top Overlay "+" at 1158.78,6604.92 h31.5 r90
DS32: Top Overlay "+" at 1395.45,6604.92 h31.5 r90
DS33: Top Overlay "+" at 1632.11,6604.92 h31.5 r90
DS34: Top Overlay "+" at 1868.78,6604.92 h31.5 r90
DS35: Top Overlay "+" at 1163.78,6059.92 h31.5 r90
DS36: Top Overlay "+" at 1400.45,6059.92 h31.5 r90
DS37: Top Overlay "+" at 1637.11,6059.92 h31.5 r90
DS38: Top Overlay "+" at 1873.78,6059.92 h31.5 r90
DS39: Top Overlay "+" at 5871.22,5760.08 h31.5 r270
DS40: Top Overlay "+" at 5634.55,5760.08 h31.5 r270
DS41: Top Overlay "+" at 5397.89,5760.08 h31.5 r270
DS42: Top Overlay "+" at 5161.22,5760.08 h31.5 r270
K1: Top Overlay "*" at 6070,4635 h50
K2: Top Overlay "*" at 4685,2835 h50
K3: Top Overlay "*" at 6950,4635 h50
K4: Top Overlay "*" at 6510,4635 h50
K5: Top Overlay "*" at 6800,2945 h50
K6: Top Overlay "*" at 6375,2945 h50
K7: Top Overlay "*" at 5585,2835 h50
K8: Top Overlay "*" at 5150,2835 h50
K9: Top Overlay "*" at 3555,2435 h50 r180
K9: Top Overlay "*" at 6540,5715 h50
K10: Top Overlay "*" at 4020,2435 h50 r180
K11: Top Overlay "*" at 5190,4965 h50
K12: Top Overlay "*" at 4750,4965 h50
K13: Top Overlay "*" at 4060,6915 h50 r180
K14: Top Overlay "*" at 4055,6050 h50 r180
K15: Top Overlay "*" at 3425,5245 h50
K16: Top Overlay "*" at 3855,5245 h50
K17: Top Overlay "*" at 2400,5045 h50 r90
K18: Top Overlay "*" at 2400,4615 h50 r90
K19: Top Overlay "*" at 2400,4185 h50 r90
K20: Top Overlay "*" at 2400,3750 h50 r90
K21: Top Overlay "*" at 4545,6045 h50 r90
K22: Top Overlay "*" at 6420,6050 h50 r90
K23: Top Overlay "*" at 5490,6045 h50 r90
K24: Top Overlay "*" at 4545,6491.67 h50 r90
K25: Top Overlay "*" at 6420,6493.33 h50 r90
K26: Top Overlay "*" at 5490,6490 h50 r90
K27: Top Overlay "*" at 4545,6938.33 h50 r90
K28: Top Overlay "*" at 6420,6936.67 h50 r90
K29: Top Overlay "*" at 5490,6935 h50 r90
K30: Top Overlay "*" at 4545,7385 h50 r90
K31: Top Overlay "*" at 6420,7380 h50 r90
K32: Top Overlay "*" at 5490,7380 h50 r90
K33: Top Overlay "*" at 2965,6495 h50 r90
K34: Top Overlay "*" at 2965,7375 h50 r90
K35: Top Overlay "*" at 2965,6935 h50 r90
K36: Top Overlay "*" at 2965,6055 h50 r90
K37: Top Overlay "*" at 2400,2875 h50 r90
K38: Top Overlay "*" at 2400,2010 h50 r90
K39: Top Overlay "*" at 2400,2445 h50 r90
K40: Top Overlay "*" at 2400,1580 h50 r90